# Altium PCB ch32-mainboard-v4.PcbDoc (part 1 of 2)
Units mil, origin at the board's own origin, x right, y up, seen from the top; angles counter-clockwise.
Board outline 5137.01 x 3091.1 mil, 2 copper layers (Top Layer, Bottom Layer); 87 components, 107 nets, 428 pads, 247 vias.
Unrouted connection lines stored in the file: 108.
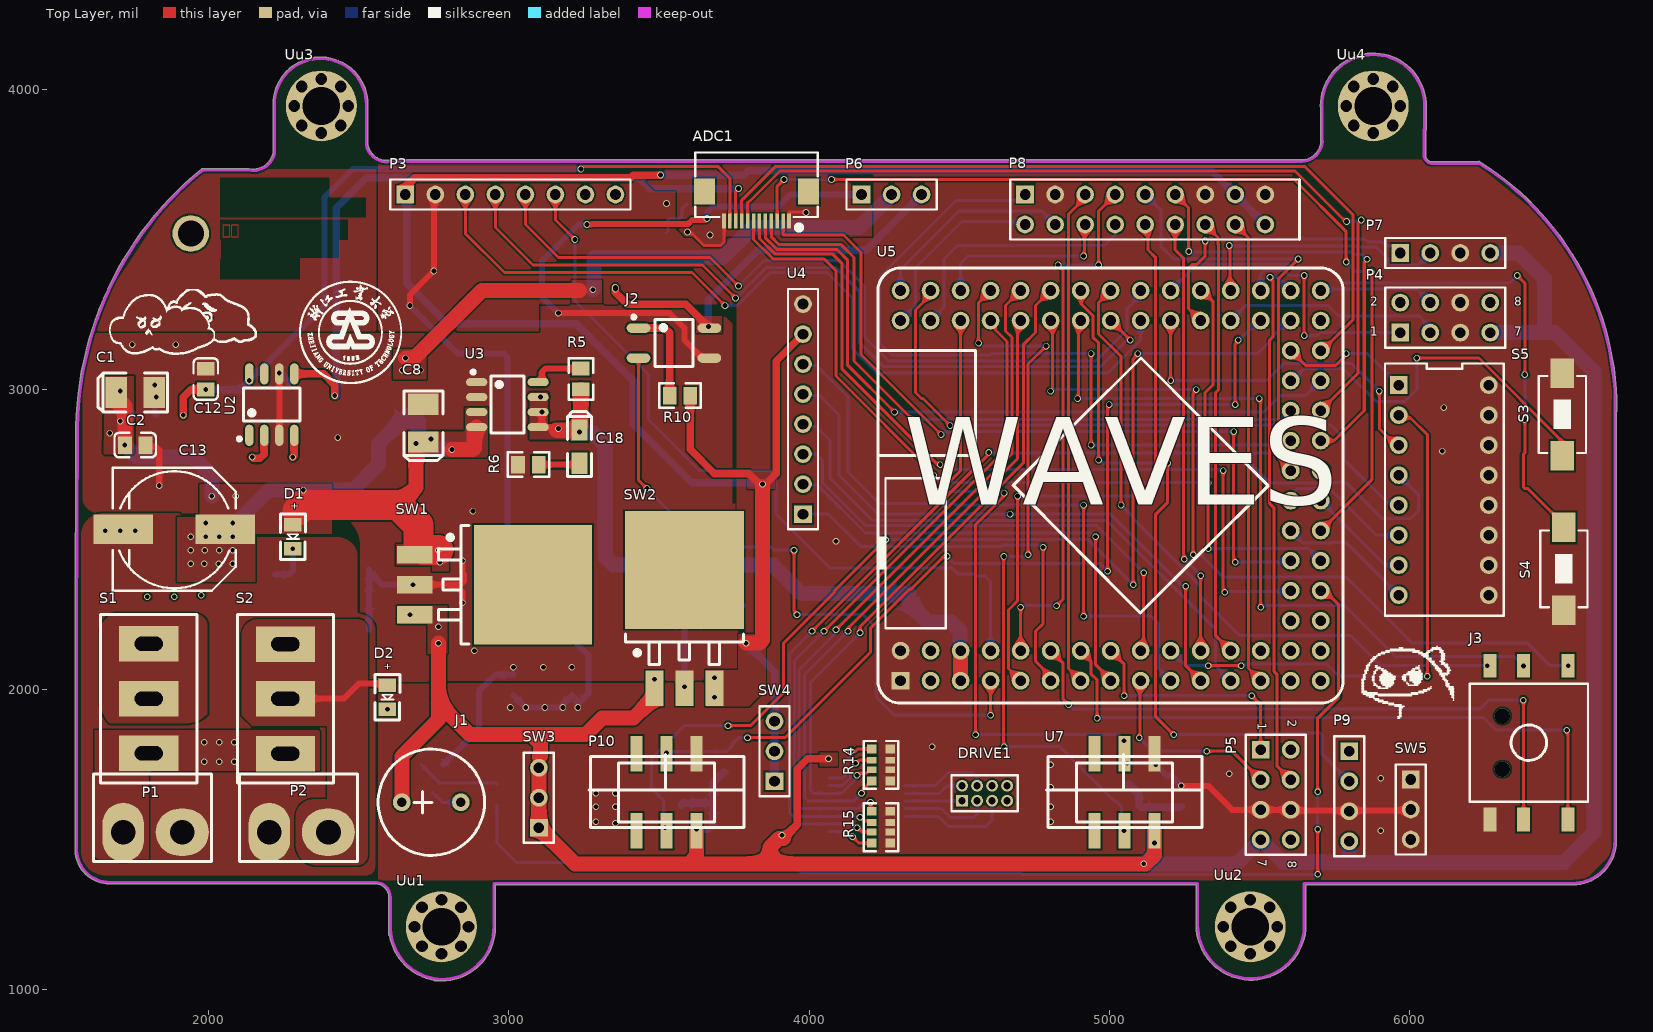
[diagram p0: Top Layer view]
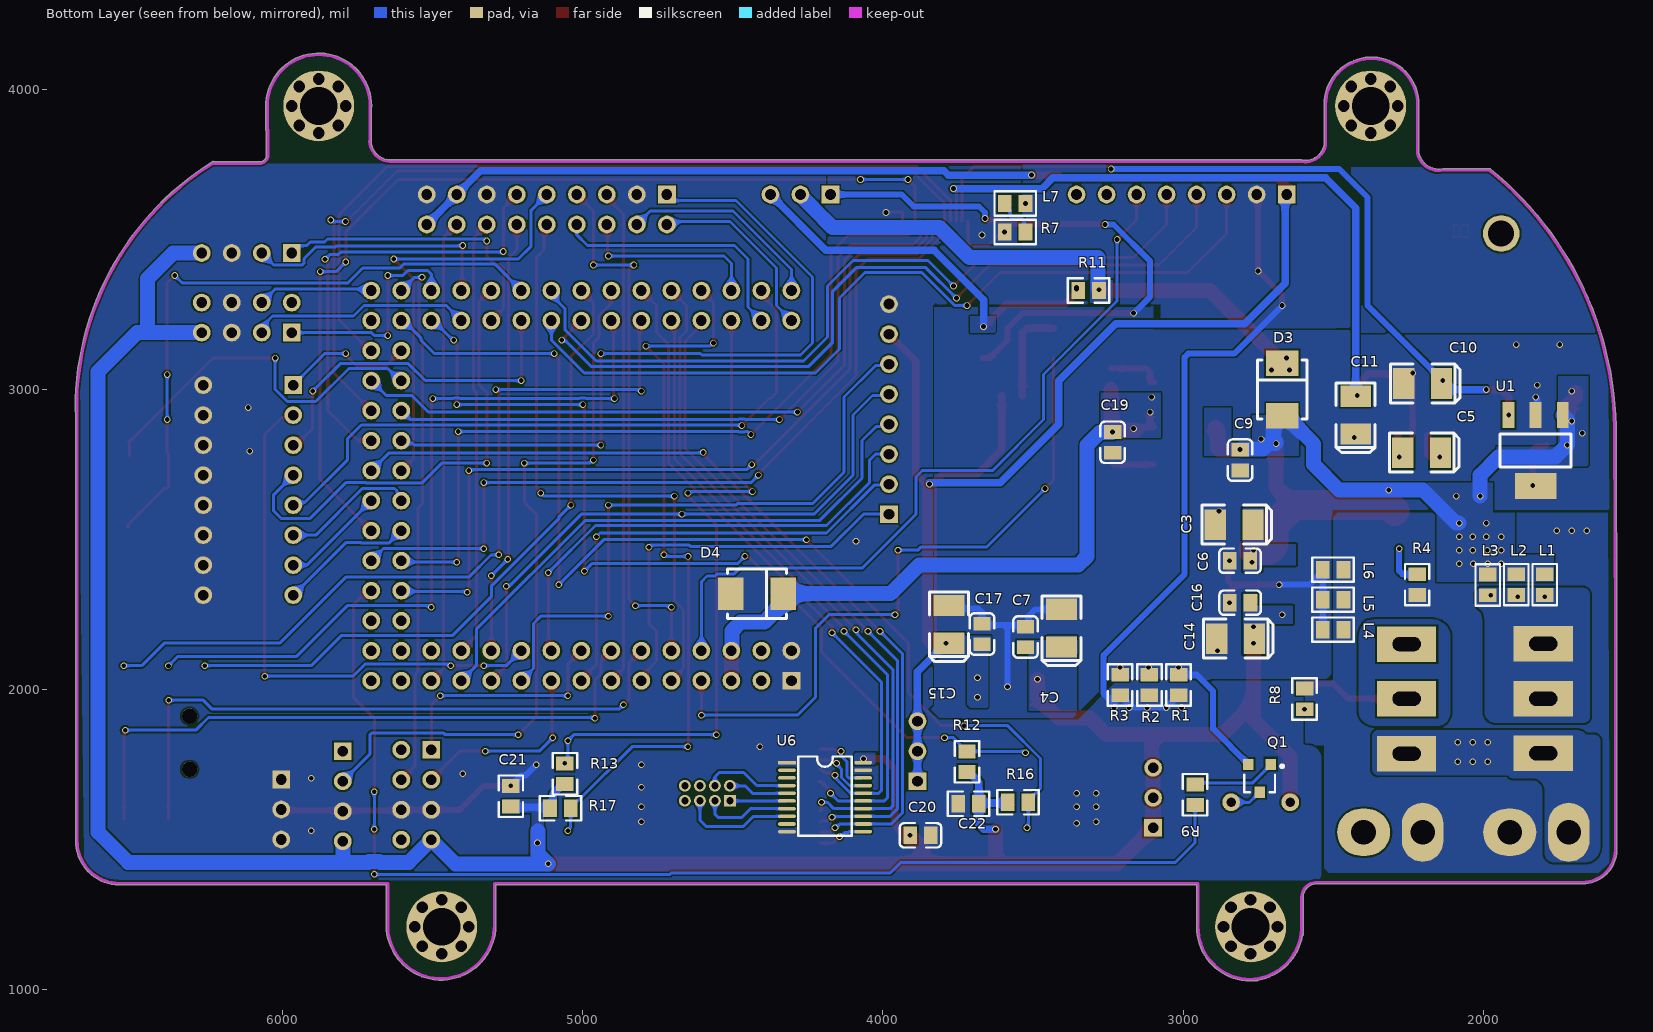
[diagram p1: Bottom Layer view, seen from below]
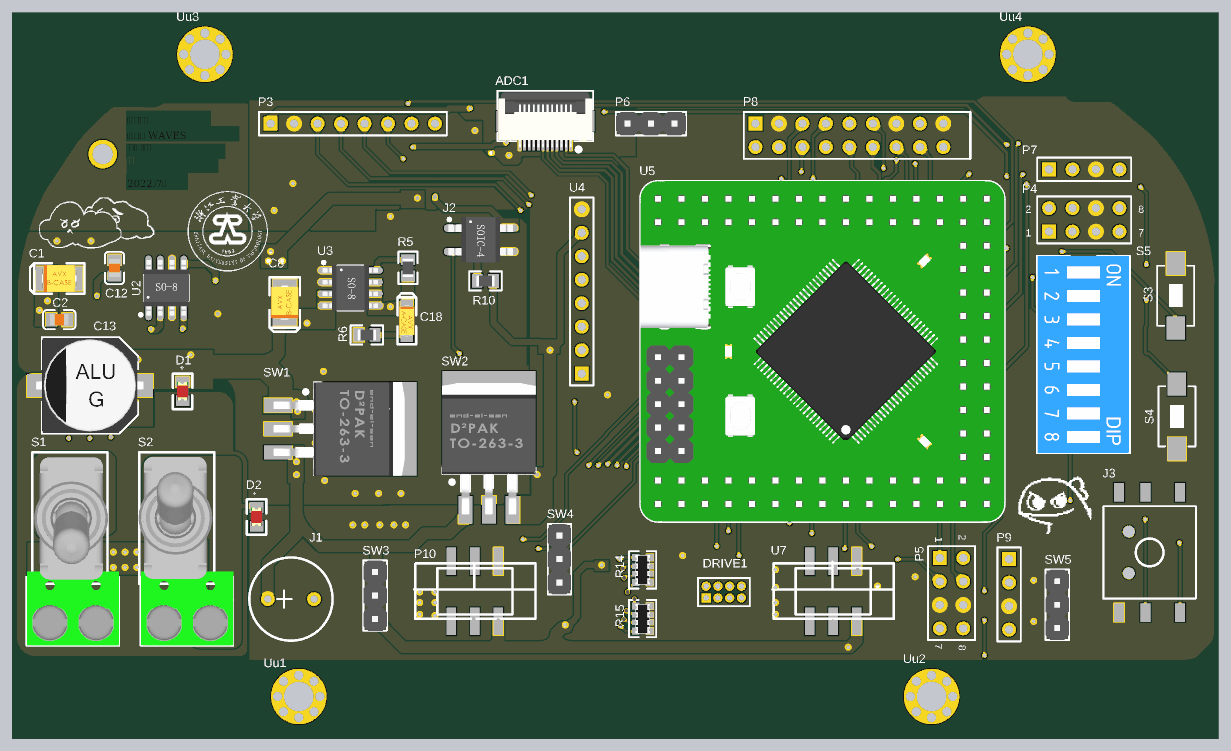
[diagram p3: 3D render of the assembled board from above, using the file's embedded part models]
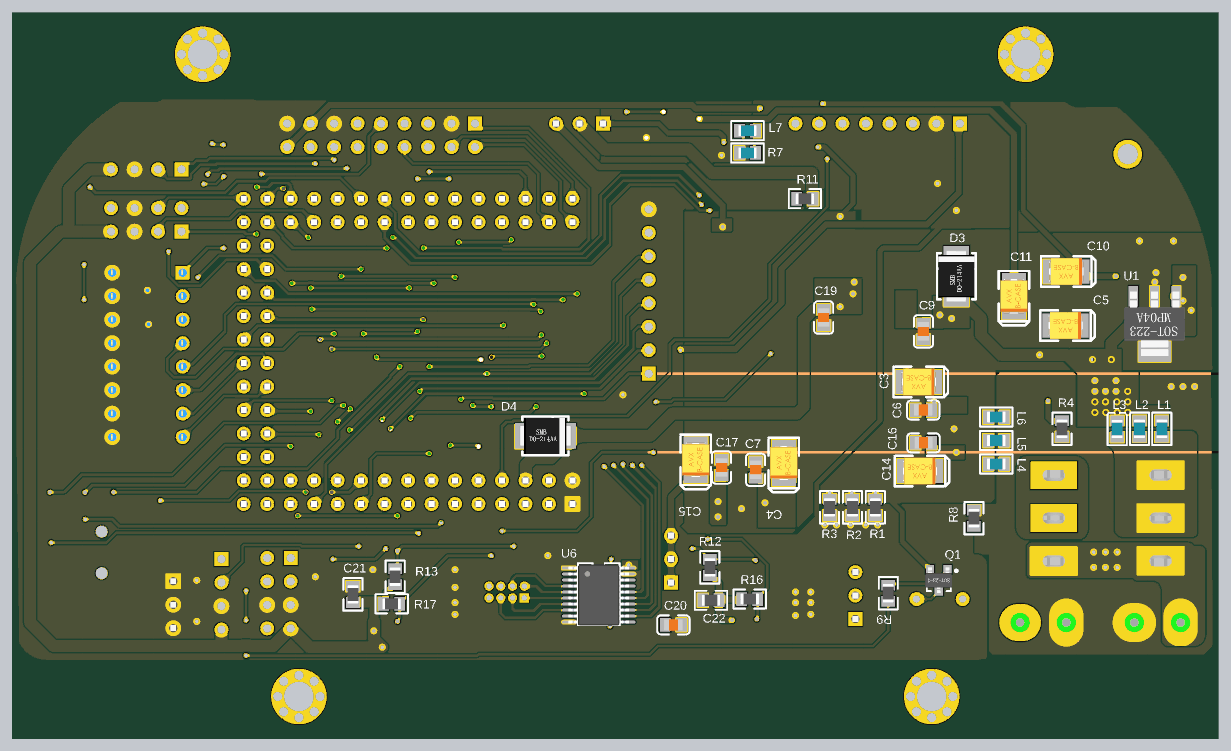
[diagram p4: 3D render of the assembled board from below, using the file's embedded part models]

## Layer stack, top to bottom
Top Solder: solder mask 0.4, Solder Resist, Dk 3.5
Top Layer: signal copper 1.4
Dielectric 1: dielectric 12.6, FR-4, Dk 4.8
Bottom Layer: signal copper 1.4
Bottom Solder: solder mask 0.4, Solder Resist, Dk 3.5

## Board outline
1669.94,1353.13 2553.11,1353.13 ccw(c2553.15,1358.15) 2553.33,1353.13 cw(c2555,1308.15) 2599.99,1309.9 2599.99,1215.05 cw(c2781.25,1211.25) 2599.99,1215.11 2599.99,1215.05 ccw(c2781.25,1211.25) 2599.99,1207.45 2599.99,1185 ccw(c2605,1185) 2602.55,1180.62 ccw(c2781.25,1211.25) 2750.62,1032.55 ccw(c2755,1035) 2755,1029.98 2770,1029.98 ccw(c2770,1035) 2771.48,1030.21 ccw(c2781.25,1211.25) 2777.39,1029.99 ccw(c2777.5,1035) 2777.5,1029.98 ccw(c2777.5,1035) 2777.54,1029.99 ccw(c2776.25,1208.75) 2955.02,1208.75 ccw(c2776.25,1208.75) 2955.01,1210.04 ccw(c2950,1210) 2954.35,1212.5 ccw(c2950,1215) 2955.01,1215 2955.01,1349.98 5289.98,1349.98 5289.98,1215.68 ccw(c5294.96,1215.07) 5289.95,1215.07 ccw(c5472.52,1215.07) 5655.08,1215.07 ccw(c5472.52,1215.07) 5655.02,1220.07 ccw(c5472.52,1215.07) 5655.01,1220.14 5655.02,1220 5655.02,1349.99 6545,1349.98 ccw(c6545,1355) 6545.04,1349.99 ccw(c6543.75,1496.25) 6690.02,1496.25 ccw(c6543.75,1496.25) 6690.02,1497.52 ccw(c6543.75,1496.25) 6690.01,1497.54 6690.02,1497.5 6690.02,1663.75 6690.01,2926.28 ccw(c6686.7,2930.04) 6691.71,2930.02 ccw(c5720,2935) 6691.72,2935 ccw(c5720,2935) 6234.54,3759.31 ccw(c6231.88,3755.06) 6228.44,3758.7 6076.7,3758.7 cw(c6076.7,3781.06) 6054.34,3781.06 ccw(c6049.32,3781.06) 6054.33,3781.18 ccw(c6049.32,3781.36) 6054.34,3781.3 6056.07,3943.92 ccw(c6051.17,3945) 6056.19,3945 ccw(c5880,3945) 6056.13,3949.52 6056.19,3954.95 ccw(c6051.17,3955) 6056.19,3955 ccw(c6051.17,3955) 6055.78,3956.98 ccw(c5880,3945) 5703.81,3945 ccw(c5708.83,3945) 5704.98,3941.78 5704.98,3825.18 cw(c5640,3830) 5644.83,3765.01 2605.04,3765.01 ccw(c2605,3760) 2604.09,3764.93 cw(c2592.5,3827.5) 2530.01,3815.47 2530.01,3950 ccw(c2372.05,3950) 2214.09,3950 2214.09,3789.17 cw(c2147.71,3802.29) 2146.92,3734.63 ccw(c2145,3730) 2145.39,3735 2145.41,3735 2145.39,3735 2134.53,3735.9 ccw(c2134.1,3730.9) 2131.93,3735.42 2116.06,3735.91 2116.05,3735.91 2116.06,3735.91 ccw(c2115.9,3730.9) 2115.9,3735.91 1981.04,3735.91 ccw(c1979.23,3731.23) 1976.07,3735.13 ccw(c2689.54,2855.92) 1557.36,2841.05 1554.71,2208.89 ccw(c1559.72,2208.87) 1554.71,2208.87 1554.71,1465 ccw(c1559.72,1465) 1555.04,1463.21 ccw(c1669.49,1467.74) 1669.12,1353.2 ccw(c1669.94,1358.15)

## Design rules (kind name [scope] priority, off if disabled: settings)
Clearance [All] p1: gap=6 ignorepadtopadclearanceinfootprint=TRUE except(0: Arc-Hole Track-Hole SMDPad-Hole THPad-Hole Via-Hole Fill-Hole Poly-Hole Region-Hole Text-Hole)
ComponentClearance [All] p1: gap=0 collisioncheckmode=3 verticalgap=0 showdistances=TRUE
Height [All] p1: minheight=0 maxheight=99999 prefheight=500
HoleSize [All] p1: absolutevalues=TRUE maxlimit=200 minlimit=1 maxpercent=80.000 minpercent=20.000
HoleToHoleClearance [All] p1: gap=0 allowstackedmicrovias=TRUE
MinimumSolderMaskSliver [All] p1: minsoldermaskwidth=0
PlaneConnect [All] p1: planeconnectstyle=Direct reliefexpansion=20 reliefentries=4 reliefconductorwidth=10 reliefairgap=10
PolygonConnect [All] p1: connectstyle=Direct reliefconductorwidth=10 reliefentries=4 polygonreliefangle="90 Angle" airgapwidth=10
RoutingVias [All] p1: holewidth=100 width=22 viastyle="Through Hole" minholewidth=0 minwidth=0 maxholewidth=16 maxwidth=100
SilkToSilkClearance [All] p1: silktosilkclearance=0
SilkToSolderMaskClearance [IsPad] p1: minsilkscreentomaskgap=0 clearancetoexposedcopper=TRUE
SolderMaskExpansion [All] p1: expansion=4 istentingtop=FALSE
Width [All] p1: maxlimit=100 minlimit=10 preferedwidth=10
22 further rules are at their usual default settings.

## Components (designator, comment, footprint, x,y, rotation, side; value= is the part's Value field where it differs from the comment)
ADC1 "ADC" "FPC0.5 2H-WS-12P" 3825,3660 r180 top
C1 "Cap-Pol" LC-CASE-B_3528 1755,2990 r180 top value=47uF
C2 "Cap" LC-0805_C 1755,2815 r180 top value=0.1uF
C3 "10uf" LC-CASE-B_3528 2830,2550 r180 bottom
C4 "10uf" LC-CASE-B_3528 3405,2205 r270 bottom
C5 "47uF" LC-CASE-B_3528 2205,2790 r180 bottom
C6 "104" LC-0805_C 2810.55,2430 r180 bottom
C7 "104" LC-0805_C 3525,2175.55 r270 bottom
C8 "Cap-Pol" LC-CASE-B_3528 2715,2887.99 r270 top value=10uF
C9 "Cap" LC-0805_C 2810,2765 r90 bottom value=0.1uF
C10 "Cap-Pol" LC-CASE-B_3528 2202.01,3020 r180 bottom value=47uF
C11 "47uF" LC-CASE-B_3528 2425,2915 r270 bottom
C12 "Cap" LC-0805_C 1990,3035 r270 top value=0.1uF
C13 "Cap-Pol-ES" C-RB-SD10 1885,2535 r180 top value=470uF
C14 "10uF" LC-CASE-B_3528 2825,2170 r180 bottom
C15 "10uF" LC-CASE-B_3528 3780,2217.99 r270 bottom
C16 "104" LC-0805_C 2810,2290 r180 bottom
C17 "104" LC-0805_C 3670,2185.55 r270 bottom
C18 "Cap-Pol" LC-CASE-A_3216 3235,2809.88 r90 top value=10uF
C19 "Cap" LC-0805_C 3235,2824.45 r90 bottom value=0.1uF
C20 "Cap" LC-0805_C 3875,1515 r0 bottom value=0.1uF
C21 "Cap" LC-0805_R 5240,1645 r270 bottom value=0.1uF
C22 "Cap" LC-0805_R 3715,1620 r180 bottom value=0.1uF
D1 "LED" LED0805 2279.8,2550 r270 top
D2 "LED" LED0805 2595,2015 r270 top
D3 "D Schottky" LC-SMB(DO-214AA)_S1 2670,3000 r270 bottom
D4 "D Schottky" LC-SMB(DO-214AA)_S1 4420,2320 r0 bottom
DRIVE1 "DRVE" MHDR2X4 4510,1630 r0 top
J1 "BEEP" FMQ-mini 2643.15,1625 r0 top
J2 "TLP521" LC-SOP-4_P2.54 3550,3155 r0 top
J3 "导航按键" KEY_5 6268.66,1567.68 r90 top
L1 "Inductor" LC-0805_L 1795,2350 r90 bottom value=10uH
L2 "Inductor" LC-0805_L 1890,2350 r90 bottom value=10uH
L3 "Inductor" LC-0805_L 1985,2349.45 r90 bottom value=10uH
L4 "Inductor" LC-0805_L 2500,2200 r0 bottom value=10uH
L5 "Inductor" LC-0805_L 2500,2300 r0 bottom value=10uH
L6 "Inductor" LC-0805_L 2500,2400 r0 bottom value=10uH
L7 "10UH" LC-0805_L 3559.45,3620 r180 bottom
P1 "POWER" "Con 2接线端子" 1813.43,1525 r0 top
P2 "MOTOR" "Con 2接线端子" 2300,1525 r0 top
P3 "陀螺仪" HDR1X8 2655,3650 r0 top
P4 "蓝牙1" HDR2X4 5970,3190 r0 top
P5 "蓝牙2" HDR2X4 5505,1800 r270 top
P6 "FUTUBA" HDR3X1-2.54 4175,3650 r0 top
P7 "Header 4" HDR1X4 5970,3455 r0 top
P8 "总钻风" 总钻风直插 5200,3580 r0 top
P9 "Header 4" HDR1X4 5800,1795 r270 top
P10 "编码器" 编码器 3544,1685 r0 top
Q1 "S8050" SOT23-3 2745,1705 r0 bottom
R1 "Res1" LC-0805_R 3015,2015.55 r270 bottom value=0
R2 "Res1" LC-0805_R 3112.5,2015.55 r270 bottom value=0
R3 "Res1" LC-0805_R 3210,2015.55 r270 bottom value=0
R4 "Res1" LC-0805_R 2220,2350 r90 bottom value=1K5
R5 "Res1" LC-0805_R 3240,3035.55 r90 top value=250K
R6 "Res1" LC-0805_R 3065,2750 r0 top value=1R
R7 "0k" LC-0805_L 3559.45,3525 r180 bottom value=0R
R8 "Res1" LC-0805_R 2595.2,1969.45 r270 bottom value=1k5
R9 "Res1" LC-0805_R 2960,1650 r270 bottom value=4K7
R10 "Res1" LC-0805_R 3570,2980 r0 top value=100
R11 "Res1" LC-0805_R 3315,3330 r0 bottom value=1.9K
R12 "Res1" LC-0805_R 3720,1760 r90 bottom value=4K7
R13 "4.7k" LC-0805_R 5060,1720 r90 bottom value=4K7
R14 "Res Pack" LC-0603_Rx4 4239.68,1749.25 r270 top value=1K
R15 "Res Pack" LC-0603_Rx4 4239.68,1541.85 r270 top value=1K
R16 "Res1" LC-0805_R 3550,1625 r180 bottom value=4K7
R17 "4.7k" LC-0805_R 5075,1605 r180 bottom value=4K7
S1 "SW-SPDT" 纽子开关 1800,1968 r180 top
S2 "SW-SPDT" 纽子开关 2255,1972 r0 top
S3 "SW-PB" SW_PB2_A1 6510,2915 r0 top
S4 "SW-PB" SW_PB2_A1 6515,2405 r180 top
S5 "拨码开关" DIP-16-KEY 5965,3015 r270 top
SW1 "Switch" LC-TO-263-3 2686.3,2350 r180 top
SW2 "Switch" LC-TO-263-3 3585,2005 r270 top
SW3 "Switch" HDR3X1_2.54_3pin 3100,1540 r90 top
SW4 "Switch" HDR3X1_2.54_3pin 3885,1695 r90 top
SW5 "Switch" HDR3X1_2.54_3pin 6005,1700.93 r270 top
U1 "LM2940" LC-SOT-223 1825.55,2796.89 r90 bottom
U2 "LM2662" LC-SOIC-8_150mil 2210,2950 r0 top
U3 "TPS7350" LC-SOIC-8_150mil 2995,2950 r270 top
U4 "TFT_LCD" HDR1X4_100_8pin 3980,2585 r90 top
U5 "CH32V307VxT6_CoreBoardV1.3" CH32V307VxT6_CoreBoard 4305,2030 r0 top
U6 "74HC245" TSSOP20 4320,1757.36 r180 bottom
U7 "编码器" 编码器 5070,1685 r0 top
Uu1 "定位孔" 定位孔 2775,1210 r0 top
Uu2 "定位孔" 定位孔 5470,1210 r0 top
Uu3 "定位孔" 定位孔 2375,3945 r0 top
Uu4 "定位孔" 定位孔 5880,3945 r0 top

## Footprints (in the part's own frame and the unit in brackets; to place one, negate y for a bottom-side part, rotate by r counter-clockwise, add the part's x,y. Pads: shape width x height; smd on the part's side, far side on the other; paste and mask are expansions set on the pad)
C-RB-SD10 [mm]
  rect 5x2.5 smd: 1(-4.318,0) 2(4.318,0)
  silkscreen extent -5.21,-5.21 5.21,5.21, body extent -5.8,-5.15 5.8,5.15, height 10.2
CH32V307VxT6_CoreBoard [mm] "逐飞科技CH32V307VxT6核心板"
  rect 1.5x1.5 hole 0.9: 1(0,0)
  round 1.5 hole 0.9: 2(0,2.54) 3(2.54,0) 4(2.54,2.54) 5(5.08,0) 6(5.08,2.54) 7(7.62,0) 8(7.62,2.54) 9(10.16,0) 10(10.16,2.54) 11(12.7,0) 12(12.7,2.54) 13(15.24,0) 14(15.24,2.54) 15(17.78,0) 16(17.78,2.54) 17(20.32,0) 18(20.32,2.54) 19(22.86,0) 20(22.86,2.54) 21(25.4,0) 22(25.4,2.54) 23(27.94,0) 24(27.94,2.54) 25(30.48,0) 26(30.48,2.54) 27(33.02,0) 28(33.02,2.54) 29(35.56,0) 30(35.56,2.54) 31(35.56,5.08) 32(33.02,5.08) 33(35.56,7.62) 34(33.02,7.62) 35(35.56,10.16) 36(33.02,10.16) 37(35.56,12.7) 38(33.02,12.7) 39(35.56,15.24) 40(33.02,15.24) 41(35.56,17.78) 42(33.02,17.78) 43(35.56,20.32) 44(33.02,20.32) 45(35.56,22.86) 46(33.02,22.86) 47(35.56,25.4) 48(33.02,25.4) 49(35.56,27.94) 50(33.02,27.94) 51(35.56,33.02) 52(35.56,30.48) 53(33.02,33.02) 54(33.02,30.48) 55(30.48,33.02) 56(30.48,30.48) 57(27.94,33.02) 58(27.94,30.48) 59(25.4,33.02) 60(25.4,30.48) 61(22.86,33.02) 62(22.86,30.48) 63(20.32,33.02) 64(20.32,30.48) 65(17.78,33.02) 66(17.78,30.48) 67(15.24,33.02) 68(15.24,30.48) 69(12.7,33.02) 70(12.7,30.48) 71(10.16,33.02) 72(10.16,30.48) 73(7.62,33.02) 74(7.62,30.48) 75(5.08,33.02) 76(5.08,30.48) 77(2.54,33.02) 78(2.54,30.48) 79(0,33.02) 80(0,30.48)
  silkscreen extent -1.91,-1.91 37.46,34.92, body extent -1.93,-1.9 37.46,34.93, height 13.54
"Con 2接线端子" [mm]
  oval 3.5x5 hole 2.1: 1(-2.5,0)
  oval 4.5x4 hole 2.1: 2(2.5,0)
  silkscreen extent -5.03,-2.49 4.95,4.93, body extent -5,-2.5 5,5.5, height 1.5
DIP-16-KEY [mm]
  rect 1.5x1.5 hole 0.9: 1(0,0)
  round 1.5 hole 0.9: 2(2.54,0) 3(5.08,0) 4(7.62,0) 5(10.16,0) 6(12.7,0) 7(15.24,0) 8(17.78,0) 9(17.78,7.62) 10(15.24,7.62) 11(12.7,7.62) 12(10.16,7.62) 13(7.62,7.62) 14(5.08,7.62) 15(2.54,7.62) 16(0,7.62)
  silkscreen extent -1.83,-1.17 19.53,8.89, body extent -1.8,-1.09 19.52,8.81, height 7
FMQ-mini [mm]
  round 1.5 hole 0.8: 1(0,0) 2(5,0)
  silkscreen extent -2,-4.5 7,4.5
"FPC0.5 2H-WS-12P" [mm] "长：10.2mm，宽：5.2mm，高：2mm"
  rect 1.8x2.2 smd: 0(-4.4,0) 0(4.4,0)
  rect 0.3x1.3 smd: 1(-2.75,2.497) 2(-2.25,2.497) 3(-1.75,2.497) 4(-1.25,2.497) 5(-0.75,2.497) 6(-0.25,2.497) 7(0.25,2.497) 8(0.75,2.497) 9(1.25,2.497) 10(1.75,2.497) 11(2.25,2.497) 12(2.75,2.497)
  silkscreen extent -5.18,-3.3 5.18,3.23, body extent -5.1,-3.15 5.1,2.85, height 2
HDR1X4 [mm]
  rect 1.5x1.5 hole 0.9: 1(0,0)
  round 1.5 hole 0.9: 2(2.54,0) 3(5.08,0) 4(7.62,0)
  silkscreen extent -1.27,-1.27 8.89,1.27
HDR1X4_100_8pin [mm] "4pin"
  rect 1.5x1.5 hole 0.9: 1(0,0)
  round 1.5 hole 0.9: 2(2.54,0) 3(5.08,0) 4(7.62,0) 5(10.16,0) 6(12.7,0) 7(15.24,0) 8(17.78,0)
  silkscreen extent -1.27,-1.27 19.05,1.27
HDR1X8 [mm] "Connector; Header; 8 Position"
  rect 1.5x1.5 hole 0.9: 1(0,0)
  round 1.5 hole 0.9: 2(2.54,0) 3(5.08,0) 4(7.62,0) 5(10.16,0) 6(12.7,0) 7(15.24,0) 8(17.78,0)
  silkscreen extent -1.27,-1.27 19.05,1.27
HDR2X4 [mm] "Connector; Header; 4x2 Position"
  rect 1.5x1.5 hole 0.9: 1(0,0)
  round 1.5 hole 0.9: 2(0,2.54) 3(2.54,0) 4(2.54,2.54) 5(5.08,0) 6(5.08,2.54) 7(7.62,0) 8(7.62,2.54)
  silkscreen extent -1.27,-1.27 8.89,3.81
HDR3X1-2.54 [mm] "2.54单排针排座"
  rect 1.5x1.5 hole 0.9: 1(0,0)
  round 1.5 hole 0.9: 2(2.54,0) 3(5.08,0)
  silkscreen extent -1.27,-1.27 6.35,1.27, body extent -1.27,-1.27 6.35,1.27, height 8.54
HDR3X1_2.54_3pin [mm] "2.54单排针排座"
  rect 1.5x1.5 hole 0.9: 1(0,0)
  round 1.5 hole 0.9: 2(2.54,0) 3(5.08,0)
  silkscreen extent -1.27,-1.27 6.35,1.27, body extent -1.27,-1.27 6.35,1.27, height 8.54
KEY_5 [mm]
  round 1.3 hole 1.3: 0(4.25,-1.05) 0(8.75,-1.05)
  rect 2x1.1 smd: 1(0,0) 2(0,-2.85) 3(0,-6.6) 4(13,0) 5(13,-2.85) 6(13,-6.6)
  silkscreen extent 1.5,-8.3 11.5,1.7
LC-0603_Rx4 [mm]
  rect 0.75x0.8 smd mask+0.051: 1(-1.35,-0.77) 4(1.35,-0.77) 5(1.35,0.77) 8(-1.35,0.77)
  rect 0.58x0.8 smd mask+0.051: 2(-0.4,-0.77) 3(0.4,-0.77) 6(0.4,0.77) 7(-0.4,0.77)
  silkscreen extent -2.02,-1.47 2.02,1.47, body extent -1.6,-0.8 1.6,0.8, height 0.55
LC-0805_C [mm]
  rect 1.16x1.47 smd: 1(-0.875,0) 2(0.875,0)
  silkscreen extent -1.76,-1.04 1.76,1.04, body extent -1,-0.61 1,0.64, height 0.8
LC-0805_L [mm]
  rect 1.16x1.47 smd: 1(-0.875,0) 2(0.875,0)
  silkscreen extent -1.76,-1.04 1.76,1.03, body extent -1,-0.6 1,0.6, height 0.95
LC-0805_R [mm]
  rect 1.16x1.47 smd: 1(-0.875,0) 2(0.875,0)
  silkscreen extent -1.76,-1.04 1.76,1.03, body extent -1,-0.6 1,0.6, height 0.5
LC-CASE-A_3216 [mm]
  rect 1.8x1.35 smd: 1(1.4,0) 2(-1.4,0)
  silkscreen extent -2.54,-1 2.97,1, body extent -1.7,-0.84 1.7,0.84, height 1.71
LC-CASE-B_3528 [mm]
  rect 1.8x2.6 smd: 1(1.6,0) 2(-1.6,0)
  silkscreen extent -2.73,-1.65 3.16,1.65, body extent -1.85,-1.47 1.85,1.46, height 2.03
LC-SMB(DO-214AA)_S1 [mil]
  rect 85x107.99 smd: 1(87.01,0) 2(-87.01,0)
  silkscreen extent -98,-83 98,83, body extent -110,-77 110,77, height 98
LC-SOIC-8_150mil [mm]
  oval 0.7x1.8 smd: 1(-1.905,-2.6) 2(-0.635,-2.6) 3(0.635,-2.6) 4(1.905,-2.6) 5(1.905,2.6) 6(0.635,2.6) 7(-0.635,2.6) 8(-1.905,2.6)
  silkscreen extent -2.9,-3.05 2.4,1.4, body extent -2.45,-3 2.45,3, height 1.7
LC-SOP-4_P2.54 [mm]
  oval 2x0.8 smd: 1(-3,1.27) 2(-3,-1.27) 3(3,-1.27) 4(3,1.27)
  silkscreen extent -3.55,-2 1.6,2.35, body extent -3.5,-2.45 3.5,2.45, height 2.9
LC-SOT-223 [mm]
  rect 2.2x1 smd: 1(3,-2.3) 2(3,0) 3(3,2.3)
  rect 2.2x3.5 smd: 4(-3,0)
  silkscreen extent -1.4,-3 1.4,3, body extent -3.48,-3.25 3.48,3.25, height 1.7
LC-TO-263-3 [mm]
  rect 10x10.1 smd: 0(-10,0)
  rect 3x1.5 smd: 1(0,-2.54) 2(0,0) 3(0,2.54)
  silkscreen extent -4.6,-5 -2,5, body extent -13.73,-5.08 0.5,5.08, height 4.87
LED0805 [mil]
  rect 45x58 smd: 1(0,0) 2(80,0.2)
  silkscreen extent -35,-41 116,42, body extent 0,-25 80,25, height 43
MHDR2X4 [mm] "Connector; Header; 4x2 Position"
  rect 1x1 hole 0.6: 1(0,0)
  round 1 hole 0.6: 2(0,1.27) 3(1.27,0) 4(1.27,1.27) 5(2.54,0) 6(2.54,1.27) 7(3.81,0) 8(3.81,1.27)
  silkscreen extent -0.9,-0.9 4.71,2.17
SOT23-3 [mm]
  rect 0.9x0.95 smd: 1(-0.95,-1.175) 2(0.95,-1.175) 3(0,1.175)
  silkscreen extent -2.03,-1.14 1.3,1.18, body extent -1.45,-1.4 1.45,1.4, height 1.2
SW_PB2_A1 [mm]
  rect 2x2.5 smd: 1(0,3.556) 2(0,-3.444)
  silkscreen extent -2,-3.19 2,3.31, body extent -1.93,-3.94 1.92,3.95, height 2.5
TSSOP20 [mm]
  rect 1.5x0.3 smd: 1(0,0)
  oval 1.5x0.3 smd: 2(0,-0.65) 3(0,-1.3) 4(0,-1.95) 5(0,-2.6) 6(0,-3.25) 7(0,-3.9) 8(0,-4.55) 9(0,-5.2) 10(0,-5.85) 11(6.454,-5.85) 12(6.454,-5.2) 13(6.454,-4.55) 14(6.454,-3.9) 15(6.454,-3.25) 16(6.454,-2.6) 17(6.454,-1.95) 18(6.454,-1.3) 19(6.454,-0.65) 20(6.454,0)
  silkscreen extent 0.97,-6.2 5.49,0.51, body extent -0.05,-6.22 6.5,0.38, height 1.2
定位孔 [mm]
  round 6 hole 3.2: 1(0,0)
  round 1 hole 1: ""(-2.286,0) ""(-1.651,-1.651) ""(-1.651,1.651) ""(0,-2.286) ""(0,2.286) ""(1.651,-1.651) ""(1.651,1.651) ""(2.286,0)
总钻风直插 [mm]
  rect 1.5x1.5 hole 0.9: 1(-12.192,1.778)
  round 1.5 hole 0.9: 2(-9.652,1.778) 3(-7.112,1.778) 4(-4.572,1.778) 5(-2.032,1.778) 6(0.508,1.778) 7(3.048,1.778) 8(-12.192,-0.762) 9(-9.652,-0.762) 10(-7.112,-0.762) 11(-4.572,-0.762) 12(-2.032,-0.762) 13(0.508,-0.762) 14(3.048,-0.762) 15(5.588,-0.762) 16(8.128,1.778) 17(5.588,1.778) 18(8.128,-0.762)
  silkscreen extent -13.46,-2.03 11.05,3.05
纽子开关 [mm]
  rect 5x3 hole 1.2 slot 2.4 at 0 deg: 1(0,-4.699) 2(0,-0.051) 3(0,4.572)
  silkscreen extent -4.06,-7.16 4.06,7.06, body extent -4.14,-6.63 3.86,6.57, height 33.36
编码器 [mm]
  rect 1.02x3 smd: 1(2.057,2.564) 2(2.057,-3.936) 3(-0.483,2.564) 4(-0.483,-3.936) 5(-3.023,2.564) 6(-3.023,-3.936)
  silkscreen extent -7.06,-3.66 6.07,2.52

## Part data
C1 C8 C10 C18: library part Cap-Pol-A, "钽电容", LatestRevisionDate=17-Jul-2002, LatestRevisionNote="Re-released for DXP Platform.", PackageReference=RB7.6-15, Published=8-Jun-2000, Publisher="Altium Limited"
C2 C9 C12 C19 C20 C21 C22: "Capacitor", LatestRevisionDate=17-Jul-2002, LatestRevisionNote="Re-released for DXP Platform.", PackageDescription="Radial Cap, Thru-Hole; 2 Leads; 0.3 in Pin Spacing", PackageReference=RAD-0.3, Published=8-Jun-2000, Publisher="Altium Limited"
C3 C4 C14 C15: library part ELECTRO2, "Electrolytic Capacitor"
C5 C11: library part ELECTRO2_1, "Electrolytic Capacitor"
C6 C7 C16 C17: library part CAP-0603
C13: "固态电容", LatestRevisionDate=17-Jul-2002, LatestRevisionNote="Re-released for DXP Platform.", PackageReference=RB7.6-15, Published=8-Jun-2000, Publisher="Altium Limited"
D1 D2: library part LED0, "Typical INFRARED GaAs LED", LatestRevisionDate=08-Jul-2005, LatestRevisionNote="Mech Layer 1 removed.", PackageDescription="LED; 2 Leads", PackageReference=LED-0, Published=8-Jun-2000, Publisher="Altium Limited"
D3 D4: "Schottky Diode", Code_JEDEC=DO-214-AA, LatestRevisionDate=17-Jul-2002, LatestRevisionNote="Re-released for DXP Platform.", PackageDescription="DO-214-AA/SMB; 2 C-Bend Leads; Body 5.3 x 3.6 mm, inc. leads (LxW)", PackageReference=SMB, Published=8-Jun-2000, Publisher="Altium Limited"
DRIVE1 P4 P5: library part "Header 4X2", "电机驱动接口", LatestRevisionDate=17-Jul-2002, LatestRevisionNote="Re-released for DXP Platform.", Publisher="Altium Limited"
J1: library part BEEP-S, "有源蜂鸣器0905"
J2: library part TLP281, "光耦", DatasheetDocument=Nov-2003, LatestRevisionDate=04-Mar-2005, LatestRevisionNote="Sch pins 3 & 4 Swapped.", PackageReference=DIP-4, Published=24-Mar-1999, Publisher="Altium Limited"
J3: library part KEY_5, "五向导航按键"
L7: library part "0805 电感_L"
P1 P2: library part "Header 2", "Header, 2-Pin", LatestRevisionDate=17-Jul-2002, LatestRevisionNote="Re-released for DXP Platform.", Publisher="Altium Limited"
P3: library part "Header 8", "Header, 8-Pin", LatestRevisionDate=17-Jul-2002, LatestRevisionNote="Re-released for DXP Platform.", Publisher="Altium Limited"
P6: library part "Header 3", "Header, 3-Pin", LatestRevisionDate=17-Jul-2002, LatestRevisionNote="Re-released for DXP Platform.", Publisher="Altium Limited"
P7 P9: "Header, 4-Pin", LatestRevisionDate=17-Jul-2002, LatestRevisionNote="Re-released for DXP Platform.", Publisher="Altium Limited"
P10 U7: library part "Header 3X2", "光电编码器接口", LatestRevisionDate=17-Jul-2002, LatestRevisionNote="Re-released for DXP Platform.", Publisher="Altium Limited"
Q1: library part SS9014, "NPN贴片三极管", PackageDocument=Sep-1998, Code_JEDEC=TO-92A, ComponentLink1Description="Manufacturer Link", ComponentLink1URL=http://www.fairchildsemi.com/, ComponentLink2Description=Datasheet, ComponentLink2URL=http://www.fairchildsemi.com/ds/2N%2F2N3904.pdf, DatasheetDocument=1997, LatestRevisionDate=15-Jan-2003, LatestRevisionNote="PCB Footprint 'BCY-W3/D4.7' replaced", PackageReference=TO-92A, Published=8-Jun-2000, Publisher="Altium Limited"
R1 R2 R3 R4 R5 R6 R8 R9 R10 R11 R12 R16: "Resistor", LatestRevisionDate=17-Jul-2002, LatestRevisionNote="Re-released for DXP Platform.", PackageDescription="Axial Device, Thru-Hole; 2 Leads; 0.3 in Pin Spacing", PackageReference=AXIAL-0.3, Published=8-Jun-2000, Publisher="Altium Limited"
R7: library part Res_L, "Resistor", LatestRevisionDate=17-Jul-2002, LatestRevisionNote="Re-released for DXP Platform.", PackageReference=AXIAL-0.4, Published=8-Jun-2000, Publisher="Altium Limited"
R13 R17: library part Res1, "Resistor", LatestRevisionDate=17-Jul-2002, LatestRevisionNote="Re-released for DXP Platform.", PackageDescription="Axial Device, Thru-Hole; 2 Leads; 0.3 in Pin Spacing", PackageReference=AXIAL-0.3, Published=8-Jun-2000, Publisher="Altium Limited"
R14 R15: "Isolated Resistor Network", Code_IPC=SOIC127P600-16, Code_JEDEC=MS-012-AC, LatestRevisionDate=29-May-2009, LatestRevisionNote="IPC-7351 Footprint Added.", PackageDescription="16-Pin Small Outline Integrated Circuit 1.27 mm Pitch", PackageReference=SO-16, Published=24-Mar-1999, Publisher="Altium Limited"
S1 S2: "SPDT Subminiature Toggle Switch, Right Angle Mounting, Vertical Actuation", ComponentLink1Description="Manufacturer Link", ComponentLink1URL=http://www.apem.com, DatasheetVersion=05-Dec-2000, LatestRevisionDate=17-Dec-2003, LatestRevisionNote="Schematic revised, PCB Footprint replaced.", PackageDescription="Switch; 4 Leads", PackageReference=TL36WW15050, Published=24-Mar-1999, Publisher="Altium Limited"
S3 S4: "两脚贴片微动开关", LatestRevisionDate=17-Jul-2002, LatestRevisionNote="Re-released for DXP Platform.", PackageReference=SPST-2, Published=24-Mar-1999, Publisher="Altium Limited"
S5: library part SW-DIP8, "八位拨码开关", ComponentLink1Description="Manufacturer Link", ComponentLink1URL=http://www.oupiin.com/prodindx.html#Headers, LatestRevisionDate=17-Dec-2003, LatestRevisionNote="PCB Footprint replaced.", PackageDescription="DIP; 16 Leads; Row Spacing 7.62 mm; Pitch 2.54 mm", PackageReference=DIP-16-KEY, Published=24-Mar-1999, Publisher="Altium Limited"
SW1 SW2 SW3 SW4 SW5: library part 3
U1: library part LM2940IMP-5.0, "1A Low Dropout Regulator", DigiKeyPartNumber=LM2940IMP-5.0TR-ND, Manufacturer="National Semiconductor", PackageTopMarking=XYTT*L53B, PowerWise=N, Code_IPC=SOT223-4, Code_JEDEC=TO-261-AA, ComponentLink1Description="LM2940 Datasheet", ComponentLink1URL=http://www.national.com/ds/LM/LM2940.pdf, ComponentLink2Description="LM2940 Web Page", ComponentLink2URL=http://www.national.com/pf/LM/LM2940.html, ComponentLink3Description="MP04A Package Page", ComponentLink3URL=http://www.national.com/packaging/folders/mp04a.html, CompType="LDO IC", DatasheetVersion=Jan-2007, PackageDescription="Molded SOT-223, 6.50 x 3.56 x 1.6mm Body, 4 Lead, 2.3mm Pitch", PackageReference=MP04A, PackageVersion="revB, Apr-2003", PartNumber=LM2940IMP-5.0, PinCount=4, Published=4-Dec-2008, Publisher="Altium Limited", RoHS=O
U3: library part TPS7350QD, "Single Output LDO, 500 mA, Fixed 5 V Output, 5.33 to 10 V Input, with Integrated SVS, 8-pin SOIC (D), -40 to 125 degC, Green (RoHS & no Sb/Br)", Manufacturer="Texas Instruments", Supplier Part Number 1=296-8069-5-ND, Code_JEDEC=MS-012, ComponentLink1Description="Manufacturer URL", ComponentLink1URL=http://www.ti.com/, ComponentLink2Description=Datasheet, ComponentLink2URL=http://www.ti.com/general/docs/lit/getliterature.tsp?genericPartNumber=TPS7350&fileType=pdf, ComponentLink3Description="Package Specification", ComponentLink3URL=http://www.ti.com/litv/pdf/msoi002j, DatasheetVersion=SLVS124F, Eco-Plan="Green (RoHS & no Sb/Br)", Fixed Output Options(V)=5, Iout(Max)(A)=0.5, Iq(Typ)(mA)=0.3, Mounting Technology="Surface Mount", PackageDescription="8-Pin Plastic Small Outline, Body 4.9 x 3.9 mm, Pitch 1.27 mm", PackageReference=D8, PackageVersion=4040047-3/M, PartNumber=TPS7350QD, SubFamily="Single Channel LDO", Supplier 1=Digi-Key, Supplier 2=Farnell, Supplier 3=Newark, Supplier 4=Newark, Supplier 5=Mouser, Supplier Part Number 2=8461147, Supplier Part Number 3=38K8800, Supplier Part Number 4=52F2805, Supplier Part Number 5=595-TPS7350QD, Vdo(Typ)(mV)=270, Vin(Max)(V)=10, Vin(Min)(V)=5.33, Vout Adj(Max)(V)=5, Vout Adj(Min)(V)=5
U6: library part SN74LVC245DW, "Octal Bus Transceiver with 3-State Outputs", Code_IPC=SOIC127P1030-20, Code_JEDEC=MS-013, ComponentAvailability=Obsolete, ComponentLink1Description="Manufacturer Link", ComponentLink1URL=http://www.ti.com/, ComponentLink2Description="URL Link1", ComponentLink2URL=http://focus.ti.com/docs/prod/folders/print/sn74lvc245.html, DatasheetVersion=Jul-1994, LatestRevisionDate=13-Apr-2006, LatestRevisionNote="IPC-7351 Footprint Added.", PackageDescription="20-Pin Plastic Small Outline Integrated Circuit 1.27 mm Pitch", PackageReference=DW020, PackageVersion=Mar-2000, Published=8-Jun-2000, Publisher="Altium Limited"
L1 L2 L3 L4 L5 L6: Code_IEC=1005, Code_JEITA=0402, LatestRevisionDate=29-May-2009, LatestRevisionNote="IPC-7351 Footprint Added.", PackageDescription="Chip Inductor", PackageReference=0402-A, Published=8-Jun-2000, Publisher="Altium Limited"

## Free pads (board coordinates)
  round 122.05 hole 86.61: 1(1940,3520)

## Via types
v1: diameter 22, hole 16, Top Layer to Bottom Layer, 247 vias

## Nets (pads, with @x,y where several pads share a name; then routed paths per layer and width w, separated by ;. In a path a pad name is that pad's centre, name@x,y a point inside that pad or via, vN(x,y) a via of type N, cw(c..) or ccw(c..) an arc to the next point about the centre after c; other vN are vias at no path point)
-Vcheck: ADC1.10 C11.2 U2.5 | length 2321.3
  Top Layer w10: ADC1.10@3756.1,3561.69 3755.55,3562.24 3755.55,3660.55 v1(3765,3670)
  Top Layer w25: U2.5@2285,3052.36 2382.64,3052.36 2420,3015 v1(2420,2980)
  Bottom Layer w25: C11.2@2425,2977.99 2425,3605 2525.5,3705.5 3434.5,3705.5 3470,3670 v1(3765,3670)
A0: S5.8 U5.38 | length 449.5
  Bottom Layer w10: U5.38@5605,2530 5645.53,2489.47 5738.84,2489.47 5739.37,2490 5790,2490 S5.8@5965,2315
A1: S5.7 U5.39 | length 349.1
  Bottom Layer w10: U5.39@5705,2630 5920,2415 S5.7@5965,2415
A2: S5.6 U5.40 | length 451.4
  Bottom Layer w10: U5.40@5605,2630 5605,2643.27 5618.81,2657.08 5618.81,2661.19 5627.93,2670.31 5688,2670.31 5688.21,2670.53 5721.79,2670.53 5722,2670.31 5734.63,2670.31 5889.94,2515 S5.6@5965,2515
A3: R15.3 U5.41 U6.12 | length 2907.9
  Top Layer w10: v1(4010,2195) 4599.15,2784.15 v1(4599.15,2790.85) ; v1(4160,1540) 4163.25,1540 4177.14,1526.1 R15.3@4209.37,1526.1
  Bottom Layer w10: v1(4010,2195) 3935,2120 3935,1590 3972.36,1552.64 U6.12@4065.91,1552.64 4144.12,1552.64 4156.75,1540 v1(4160,1540) ; v1(4599.15,2790.85) 4600.53,2789.47 5645.53,2789.47 U5.41@5705,2730
A4: P8.5 U5.42 | length 1418.3
  Top Layer w10: U5.42@5605,2730 5564.47,2770.53 5564.47,3369.47 v1(5630,3435)
  Bottom Layer w10: P8.5@5120,3650 5172.19,3597.81 5172.19,3477.81 5215,3435 v1(5630,3435)
A5: P8.6 U5.43 | length 1507.6
  Top Layer w10: P8.6@5220,3650 5265,3605 v1(5265,3460) ; U5.43@5705,2830 5750,2830 5850,2930 5850,3425 v1(5859,3434)
  Bottom Layer w10: v1(5265,3460) 5267,3458 5807,3458 5815,3450 5843,3450 v1(5859,3434)
A6: P8.1 U5.44 | length 2518.8
  Top Layer w10: v1(4940,2815) v1(4940,3120)
  Bottom Layer w10: P8.1@4720,3650 4700,3630 4490,3630 4235,3375 4235,3155 4275,3115 4603.38,3115 4608.38,3120 v1(4940,3120) ; v1(4940,2815) 5560.47,2815 5566.09,2820.61 5595.61,2820.61 U5.44@5605,2830
A7: ADC1.8 U5.45 | length 2911.8
  Top Layer w10: ADC1.8@3795.47,3561.69 3795.47,3622.83 3801.33,3628.69 3803.69,3628.69 3903,3728 5619.37,3728 5787.37,3560 v1(5791.19,3560) ; U5.45@5705,2930 5830,3055 5830,3555 v1(5840,3565)
  Bottom Layer w10: v1(5791.19,3560) 5835,3560 v1(5840,3565)
A8: S5.5 U5.77 | length 2168.7
  Top Layer w10: U5.77@4405,3330 4405,3317.03 4380,3292.03 4380,3290 4355,3265 4355,2990 4375,2970 4380,2970 v1(4470,2880)
  Bottom Layer w10: v1(4470,2880) 4472,2882 5738,2882 5785,2835 5785,2765 5925.61,2624.39 5955.61,2624.39 S5.5@5965,2615
A9: P8.8 U5.80 | length 629.1
  Bottom Layer w10: U5.80@4305,3230 4355,3280 4355,3405 4510,3560 4710,3560 P8.8@4720,3550
A10: P8.9 U5.79 | length 684.4
  Bottom Layer w10: U5.79@4305,3330 4305,3400 4500,3595 4775,3595 P8.9@4820,3550
A15: J2.2 U5.7 | length 2274.2
  Top Layer w10: J2.2@3431.89,3105 3431.89,2698.11 v1(3460,2670) ; v1(3950,2465) 3950,2263.25 3960,2253.25 v1(3960,2250) ; v1(4605,1915) U5.7@4605,2030
  Bottom Layer w10: v1(3460,2670) 3655,2475 3874,2475 3884,2465 v1(3950,2465) ; v1(3960,2250) 4180,2250 4225,2205 4225,1975 4285,1915 v1(4605,1915)
B0: S3.2 U5.48 | length 1251.8
  Top Layer w10: v1(6025,3105) 6232.31,3105 6510,2827.31 S3.2@6510,2779.41
  Bottom Layer w10: U5.48@5605,3030 5609.97,3030 5650.5,3070.53 5779.47,3070.53 5890,2960 5984.61,2960 6025,3000.39 v1(6025,3105)
B1: ADC1.9 U5.49 | length 2720.1
  Top Layer w10: ADC1.9@3775.79,3561.69 3775.79,3630.79 3889,3744 5626,3744 5651,3744 5813.19,3581.81 5813.19,3233.19 5710,3130 U5.49@5705,3130
B2: S5.1 U5.50 | length 443.7
  Top Layer w10: U5.50@5605,3130 5655,3080 5755,3080 5790,3115 v1(5790,3120)
  Bottom Layer w10: v1(5790,3120) 5860,3120 S5.1@5965,3015
B3: U4.6 U5.19 | length 2113.1
  Top Layer w10: v1(4915,2245) v1(4915,2615)
  Bottom Layer w10: U4.6@3980,3085 3984.53,3080.47 4024.53,3080.47 4130,2975 4130,2725 4235,2620 4485,2620 4490,2615 v1(4915,2615) ; v1(4915,2245) 5140,2245 5164.47,2220.53 5164.47,2070.53 U5.19@5205,2030
B4: S5.2 U5.20 | length 1826.3
  Top Layer w10: v1(5330,2080) v1(5440,2080) ; S5.2@5970,2915 S5.2@5965,2915 5974.39,2905.61 6004.39,2905.61 6060,2850 v1(6060,2045)
  Bottom Layer w10: U5.20@5205,2130 5255,2080 v1(5330,2080) ; v1(5440,2080) 5445,2085 5725.88,2085 5765.88,2045 v1(6060,2045)
B5: U4.5 U5.21 | length 2003.7
  Top Layer w10: v1(5255,2345) 5255,2080 U5.21@5305,2030
  Bottom Layer w10: U4.5@3980,2985 3985,2980 4035,2980 4100,2915 4100,2715 4230,2585 v1(4670,2585) 5005,2585 5245,2345 v1(5255,2345) ; U4.5@3980,2990 U4.5@3981.84,2988.16 ; U4.5@3981.84,2990 U4.5@3981.84,2998.16
B6: P8.13 U5.22 | length 1455.2
  Top Layer w10: P8.13@5220,3550 5220,3465 5248.47,3436.53 5248.47,2436.53 v1(5250,2435) ; U5.22@5305,2130 v1(5305,2380)
  Bottom Layer w10: v1(5250,2435) v1(5305,2380)
B7: U4.4 U5.23 | length 1923.3
  Bottom Layer w10: U4.4@3980,2885 3988.48,2876.52 4023.48,2876.52 4070,2830 4070,2705 4212,2563 4993.11,2563 5355,2201.11 5355,2080 U5.23@5405,2030
B8: P8.14 U5.24 | length 1466.3
  Top Layer w10: P8.14@5320,3550 5363.06,3506.94 5363.06,3483.06 5364.47,3484.47 5364.47,3213.21 5365,3212.69 5365,3000 5355,2990 5355,2180 U5.24@5405,2130
B9: P8.15 U5.25 | length 1555.2
  Top Layer w10: P8.15@5420,3550 5464.47,3505.53 5464.47,2070.53 U5.25@5505,2030
B10: S5.4 U5.59 | length 1549.1
  Top Layer w10: U5.59@5305,3330 5310,3330 5345.53,3294.47 5345.53,3015.53 5320,2990 v1(5320,2755)
  Bottom Layer w10: v1(5320,2755) 5470,2755 5535.53,2689.47 5721.79,2689.47 5722.31,2690 5790,2690 5910,2570 6004.14,2570 6030,2595.86 6030,2650 S5.4@5965,2715
B11: S5.3 U5.62 | length 1169.1
  Top Layer w10: v1(5205,3030) U5.62@5205,3230 ; v1(5900,2995) 5900,2870 5955,2815 S5.3@5965,2815
  Bottom Layer w10: v1(5205,3030) 5525,3030 5581.53,3086.53 5808.47,3086.53 v1(5900,2995)
B12: S4.2 U5.61 | length 2142.1
  Top Layer w10: v1(6360,3380) 6385,3355 v1(6385,3050) ; v1(6385,2900) 6385,2788.81 6380,2783.81 6380,2675.86 6385.86,2670 6395.43,2670 6515,2550.43 S4.2@6515,2540.59
  Bottom Layer w10: U5.61@5205,3330 5294,3419 5544.74,3419 5596,3419 5610,3405 5733,3405 5783,3355 6335,3355 v1(6360,3380) ; v1(6385,2900) v1(6385,3050)
B13: P3.3 U5.64 | length 2873.9
  Top Layer w10: P3.3@2855,3650 2855,3520 2985,3390 3610,3390 v1(3720,3280)
  Bottom Layer w10: v1(3720,3280) 3761.11,3280 3871.11,3390 4060,3390 4145,3305 4145,3135 4225,3055 4995,3055 5105,3165 U5.64@5105,3230
B14: P3.5 U5.63 | length 2655.6
  Top Layer w10: P3.5@3055,3650 3055,3550 3165,3440 3670,3440 v1(3765,3345)
  Bottom Layer w10: v1(3765,3345) 3850,3430 4100,3430 4185,3345 4185,3175 4265,3095 4955,3095 5060,3200 5060,3270 5105,3315 U5.63@5105,3330
B15: P3.4 U5.66 | length 2732.1
  Top Layer w10: P3.4@2955,3650 2955,3540 3080,3415 3645,3415 v1(3755,3305) ; U5.66@5005,3230 v1(5070,3165)
  Bottom Layer w10: v1(3755,3305) 3756.11,3305 3857.11,3406 4089,3406 4167.5,3327.5 4167.5,3157.5 4247.5,3077.5 4972.5,3077.5 5065,3170 v1(5070,3165)
C0: ADC1.6 U5.34 | length 2758.7
  Top Layer w10: ADC1.6@3834.84,3561.69 3834.84,3503.23 3887.07,3451 4079,3451 4109.32,3420.68 4109.32,3069.57 4428.89,2750 v1(4436.94,2750) ; v1(5380,2730) 5380,2333.25 5385,2328.25 v1(5385,2325)
  Bottom Layer w10: v1(4436.94,2750) 4453.94,2733 5377,2733 v1(5380,2730) ; v1(5385,2325) 5387.3,2327.3 5602.3,2327.3 U5.34@5605,2330
C1: ADC1.7 U5.35 | length 2732.2
  Top Layer w10: ADC1.7@3815.16,3561.69 3815.16,3500.29 3880.45,3435 4050.59,3435 4090,3395.59 4090,3045 4415,2720 v1(4415,2715) ; v1(5330,2470) v1(5330,2690)
  Bottom Layer w10: v1(4415,2715) 4440,2690 v1(5330,2690) ; v1(5330,2470) 5330.53,2470.53 5664.47,2470.53 U5.35@5705,2430
C2: ADC1.2 U5.36 | length 2656.8
  Top Layer w10: ADC1.2@3913.58,3561.69 3913.58,3515 4115,3515 4173.32,3456.68 4173.32,3116.68 v1(4440,2850) ; v1(5415,2860) 5415,2430 v1(5420,2425)
  Bottom Layer w10: v1(4440,2850) 4450,2860 4458.89,2860 4460.89,2858 4479.11,2858 4481.11,2860 v1(5415,2860) ; v1(5420,2425) 5590,2425 5595,2420 U5.36@5605,2430
C3: ADC1.3 U5.37 | length 3225.5
  Top Layer w10: ADC1.3@3893.9,3561.69 3893.9,3677.15 v1(3916.75,3700) ; v1(4075,3700) 5615.62,3700 5790,3525.62 v1(5790,3425) ; U5.37@5705,2530 5875,2700 v1(5875,3393)
  Bottom Layer w10: v1(3916.75,3700) v1(4075,3700) ; v1(5790,3425) 5822,3393 v1(5875,3393)
C4: ADC1.4 U5.46 | length 2251.8
  Top Layer w10: ADC1.4@3874.21,3561.69 3874.21,3509.12 3900.33,3483 4107,3483 4150,3440 4150,3095 v1(4345,2900)
  Bottom Layer w10: v1(4345,2900) 4458.89,2900 4460.89,2902 4479.11,2902 4481.11,2900 5575,2900 U5.46@5605,2930
C5: ADC1.5 U5.47 | length 2395.2
  Top Layer w10: ADC1.5@3854.53,3561.69 3854.53,3506.17 3893.7,3467 4093,3467 4127.4,3432.6 4127.4,3082.6 v1(4285,2925)
  Bottom Layer w10: v1(4285,2925) 5515,2925 5570,2980 5655,2980 U5.47@5705,3030
C6: R17.2 U5.73 U7.4 | length 2417.3
  Top Layer w10: v1(4565,3155) 4564.47,3155.53 4564.47,3289.47 U5.73@4605,3330 ; v1(4649.24,2444.24) 4648.47,2443.47 4648.47,1811.53 v1(4650,1810) ; v1(4730,2450) 4730,3085 v1(4790,3145)
  Bottom Layer w10: v1(4565,3155) 4575,3145 v1(4790,3145) ; v1(4649.24,2444.24) 4724.24,2444.24 v1(4730,2450) ; v1(4650,1810) 4835.55,1810 5016.61,1628.94 5022.72,1628.94 5040.55,1611.1 R17.2@5040.55,1605 5040.55,1542.7 5050,1533.25 v1(5050,1530)
C7: R13.2 U5.76 U7.3 | length 2242.8
  Top Layer w10: v1(4435,2660) 4505,2730 U5.76@4505,3230 ; v1(4555,1850) 4555,2550 4650,2645 v1(4650,2655)
  Bottom Layer w10: v1(4435,2660) 4645,2660 v1(4650,2655) ; v1(4555,1850) 5030,1850 v1(5050,1830) 5050,1765 v1(5060,1755)
C8: P8.10 U5.75 | length 617.4
  Top Layer w10: v1(4915,3445) 4917.3,3447.3 4917.3,3547.3 P8.10@4920,3550
  Bottom Layer w10: U5.75@4505,3330 4505,3420 4530,3445 v1(4915,3445)
C9: P8.11 U5.78 | length 861.3
  Bottom Layer w10: U5.78@4405,3230 4450,3275 4450,3435 4495,3480 4984.14,3480 5020,3515.86 P8.11@5020,3550
C10: P3.6 U5.8 | length 2545.3
  Top Layer w10: P3.6@3155,3650 3155,3565 v1(3220,3500)
  Bottom Layer w10: v1(3220,3500) 3220,3295 3465,3050 3465,2900 3635,2730 3870,2730 3870,2729.14 3890,2709.14 3890,2585 4070,2405 4477.37,2405 4497.38,2385 4554.06,2385 4560.06,2379 4586,2379 4605,2360 U5.8@4605,2130
C11: P8.12 U5.9 | length 2009.3
  Top Layer w10: v1(4695,2645) 4695,2296.11 4664.47,2265.59 4664.47,2070.53 U5.9@4705,2030 ; P8.12@5120,3550 5129.39,3540.61 5129.39,3465 5155,3439.39 5155,2674.47 5142.3,2661.77 5142.3,2657.3 v1(5140,2655)
  Bottom Layer w10: v1(4695,2645) 5130,2645 v1(5140,2655)
C12: P8.4 U5.10 | length 1809.8
  Top Layer w10: U5.10@4705,2130 v1(4705,2275) ; v1(4825,2280) 4845.53,2300.53 4845.53,3399.47 v1(4830,3415) ; v1(4965,3415) 4965,3595 P8.4@5020,3650
  Bottom Layer w10: v1(4705,2275) 4708.25,2275 4713.25,2280 v1(4825,2280) ; v1(4830,3415) v1(4965,3415)
C13: R9.2 U5.33 | length 3911.5
  Top Layer w10: v1(5695,1385) v1(5695,1535) ; v1(5695,1660) 5695,1905 5765,1975 5765,2283.27 5718.27,2330 U5.33@5705,2330
  Bottom Layer w10: R9.2@2960,1615.55 2960,1490 3025,1425 3940,1425 3975,1390 4704.46,1390 4710.46,1384 5694,1384 v1(5695,1385) ; v1(5695,1535) v1(5695,1660)
D0: U4.1 U5.11 | length 1324.9
  Top Layer w10: v1(4780,2475) 4780,2220 4755,2195 4755,2095 4803.16,2046.84 4803.16,2031.84 U5.11@4805,2030
  Bottom Layer w10: U4.1@3980,2585 4065,2585 4172,2478 4641.89,2478 4645.89,2482 4773,2482 v1(4780,2475)
D1: J3.2 U5.12 | length 2136.2
  Top Layer w10: U5.12@4805,2130 4845.53,2089.47 4845.53,1969.47 v1(4865,1950) ; v1(6380,1965) 6380.87,1964.13 J3.2@6380.87,1567.68
  Bottom Layer w10: v1(4865,1950) 4880,1935 6235,1935 6265,1965 v1(6380,1965)
D2: P8.3 U5.13 | length 1659.8
  Top Layer w10: U5.13@4905,2030 4864.47,2070.53 4864.47,3584.47 4920,3640 P8.3@4920,3650
D3: J3.3 U5.14 | length 2130.2
  Top Layer w10: U5.14@4905,2130 4939,2096 4939,2053.31 4960,2032.31 v1(4960,1905) ; v1(6525,1865) 6528.5,1861.5 J3.3@6528.5,1567.68
  Bottom Layer w10: v1(4960,1905) 4962.5,1907.5 6247.5,1907.5 6290,1865 v1(6525,1865)
D4: U4.2 U5.15 | length 1553.2
  Top Layer w10: v1(4955,2510) 4955,2082.97 5005,2032.97 U5.15@5005,2030
  Bottom Layer w10: U4.2@3980,2670 U4.2@3980,2675 ; U4.2@3980,2685 3982.5,2682.5 4027.5,2682.5 4188,2522 4943,2522 v1(4955,2510)
D5: P5.1 U5.16 | length 786.1
  Top Layer w10: U5.16@5005,2130 5050,2085 v1(5050,1980) ; v1(5475,1980) 5505,1950 P5.1@5505,1800
  Bottom Layer w10: v1(5050,1980) v1(5475,1980)
D6: P5.3 U5.17 | length 655.1
  Top Layer w10: v1(5100,1840) 5102.3,1842.3 5102.3,2027.3 U5.17@5105,2030 ; v1(5325,1795) 5410,1795 P5.3@5505,1700
  Bottom Layer w10: v1(5100,1840) 5145,1795 v1(5325,1795)
D7: U4.3 U5.18 | length 1610.8
  Top Layer w10: U5.18@5105,2130 5120,2145 5115,2150 v1(5115,2390)
  Bottom Layer w10: U4.3@3980,2785 4025,2785 4045,2765 4045,2690 4188,2547 4958,2547 v1(5115,2390)